# Altium PCB BAILEY.PcbDoc (part 1 of 8)
Units mil, origin at the board's own origin, x right, y up, seen from the top; angles counter-clockwise.
Board outline 6100 x 3000 mil, 4 copper layers (Signal Layer 1, Signal Layer 2, Signal Layer 3, Signal Layer 4), stack 59.904 mil thick; 167 components, 96 nets, 718 pads, 2907 vias.
Unrouted connection lines stored in the file: 1.
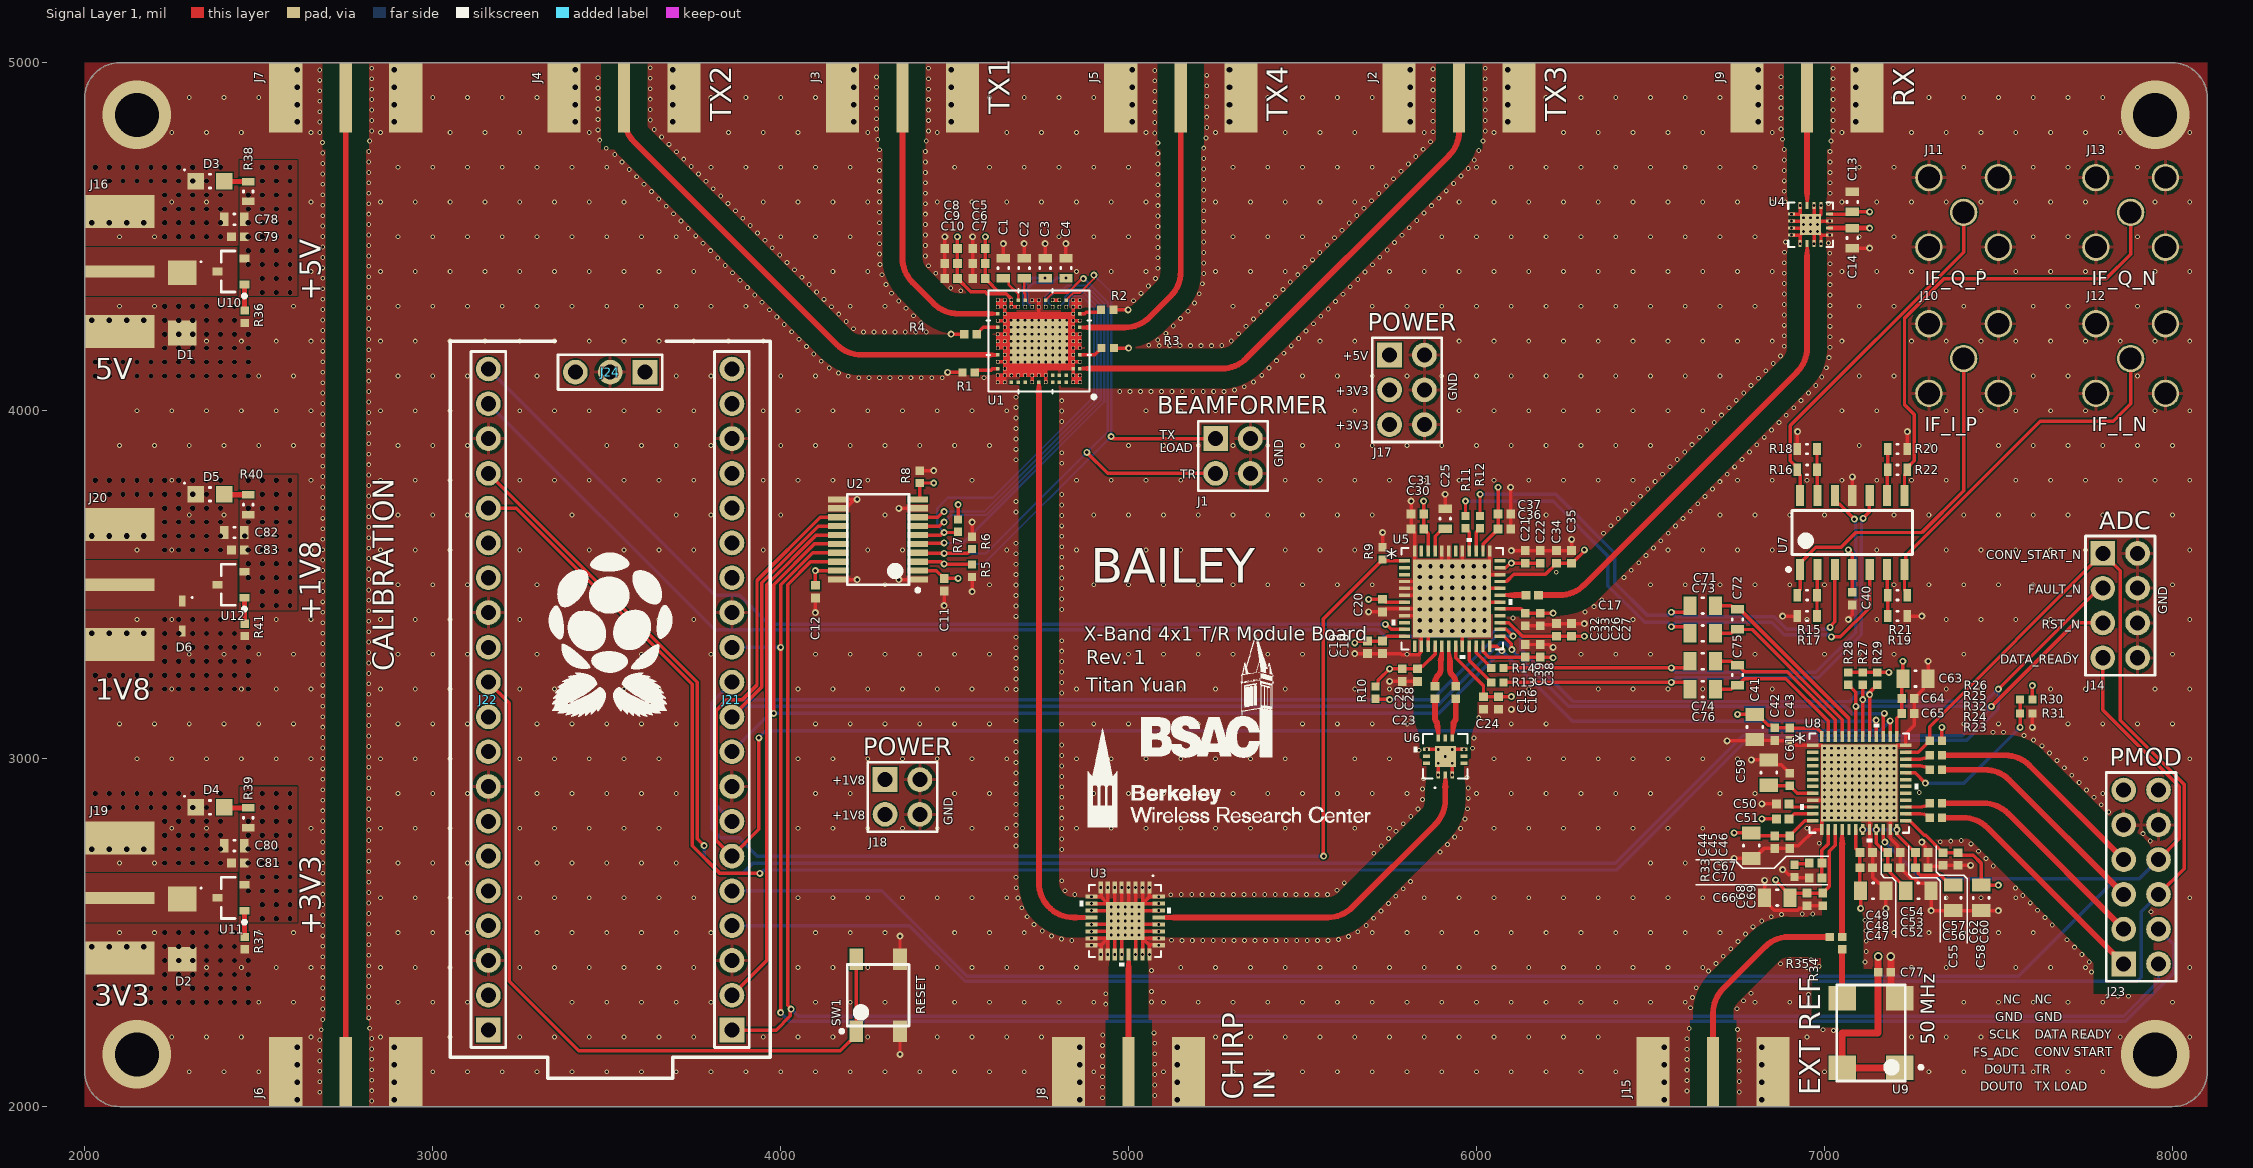
[diagram p0: Signal Layer 1 view]
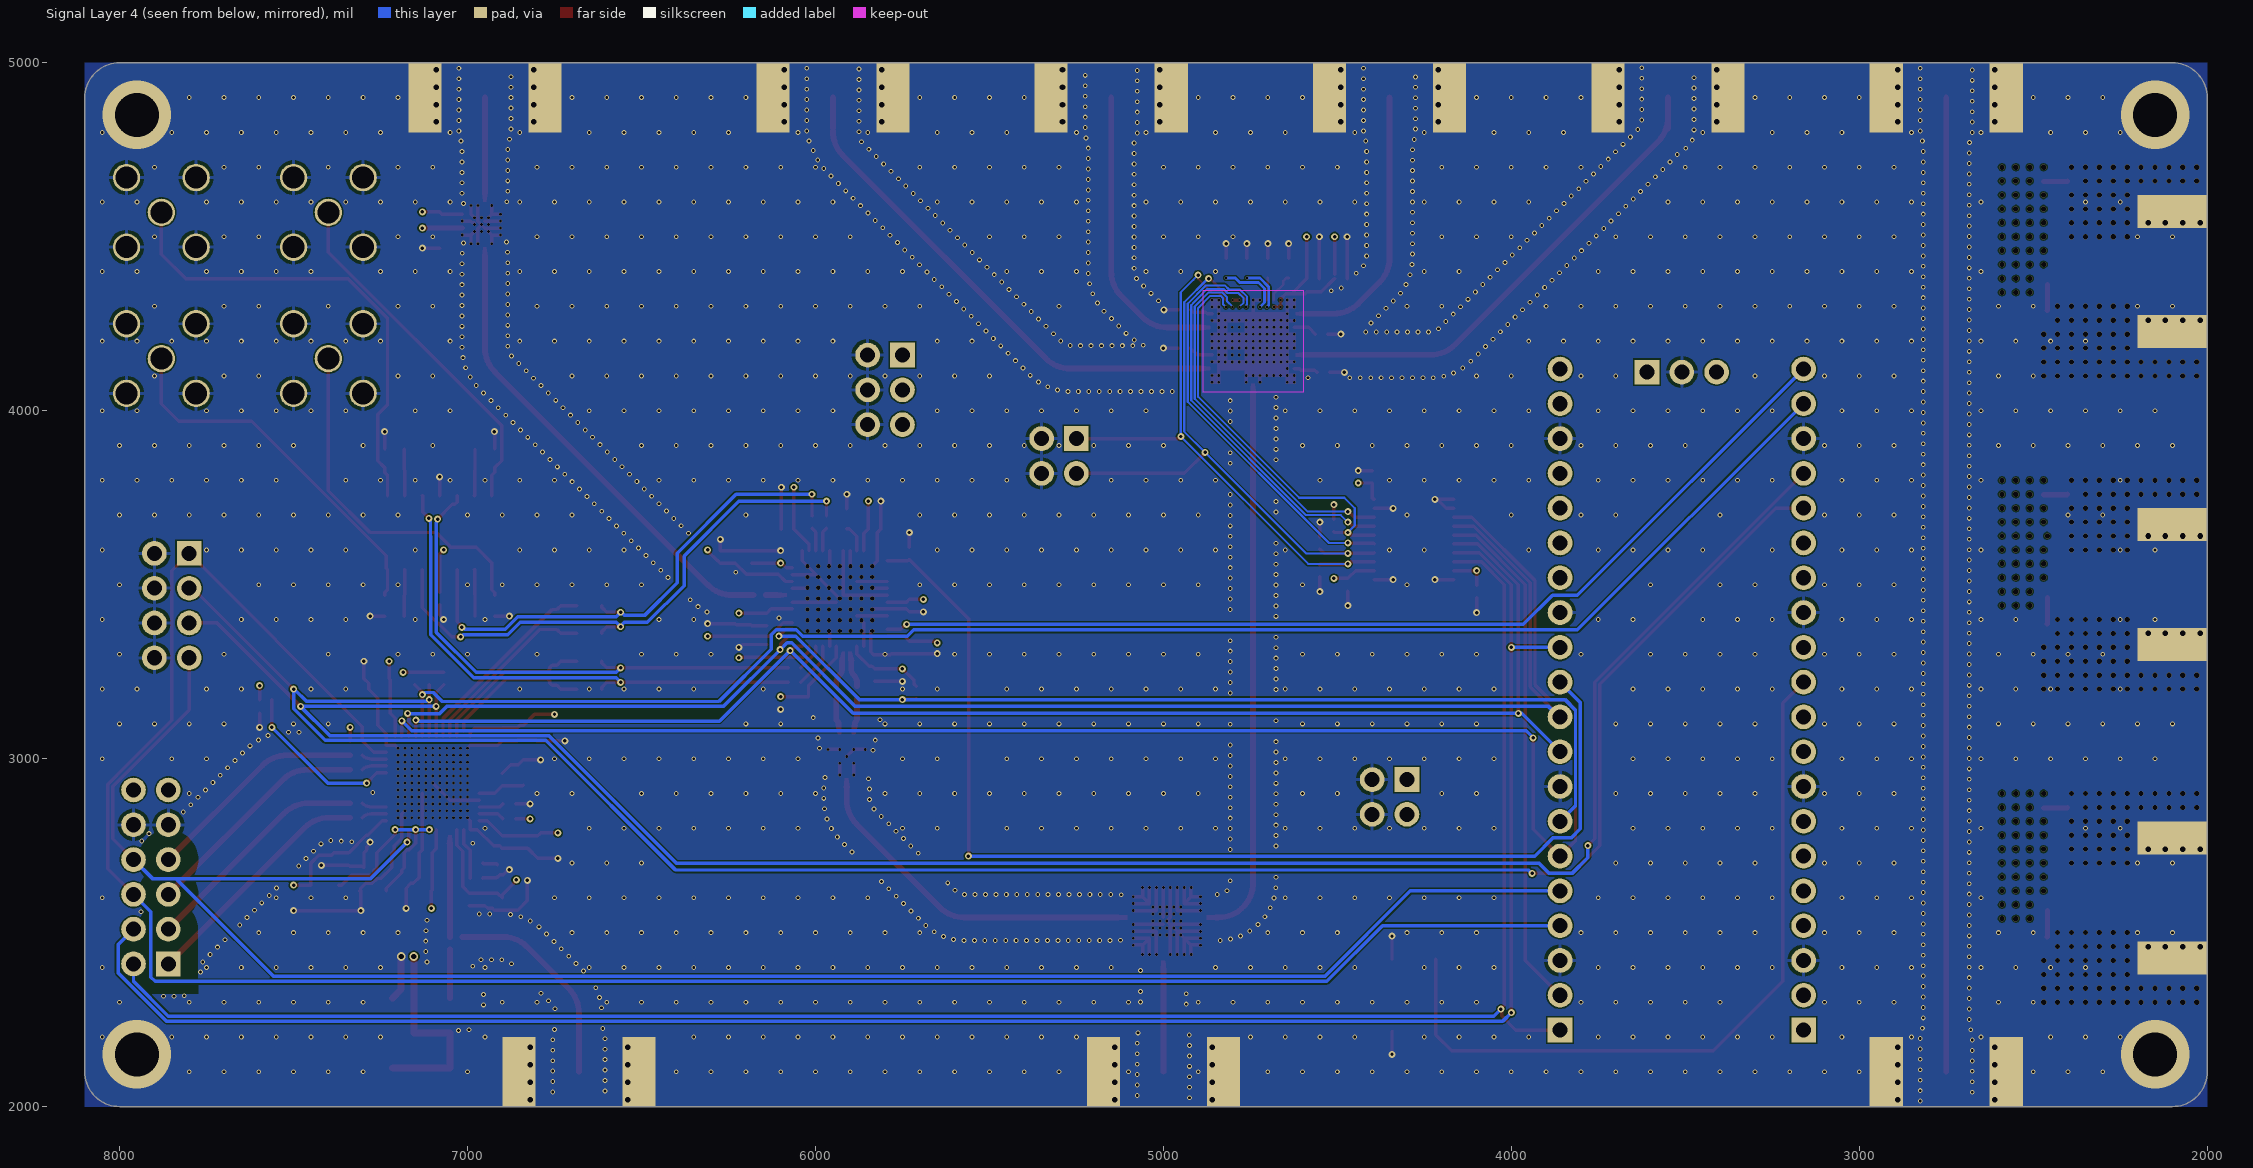
[diagram p1: Signal Layer 4 view, seen from below]
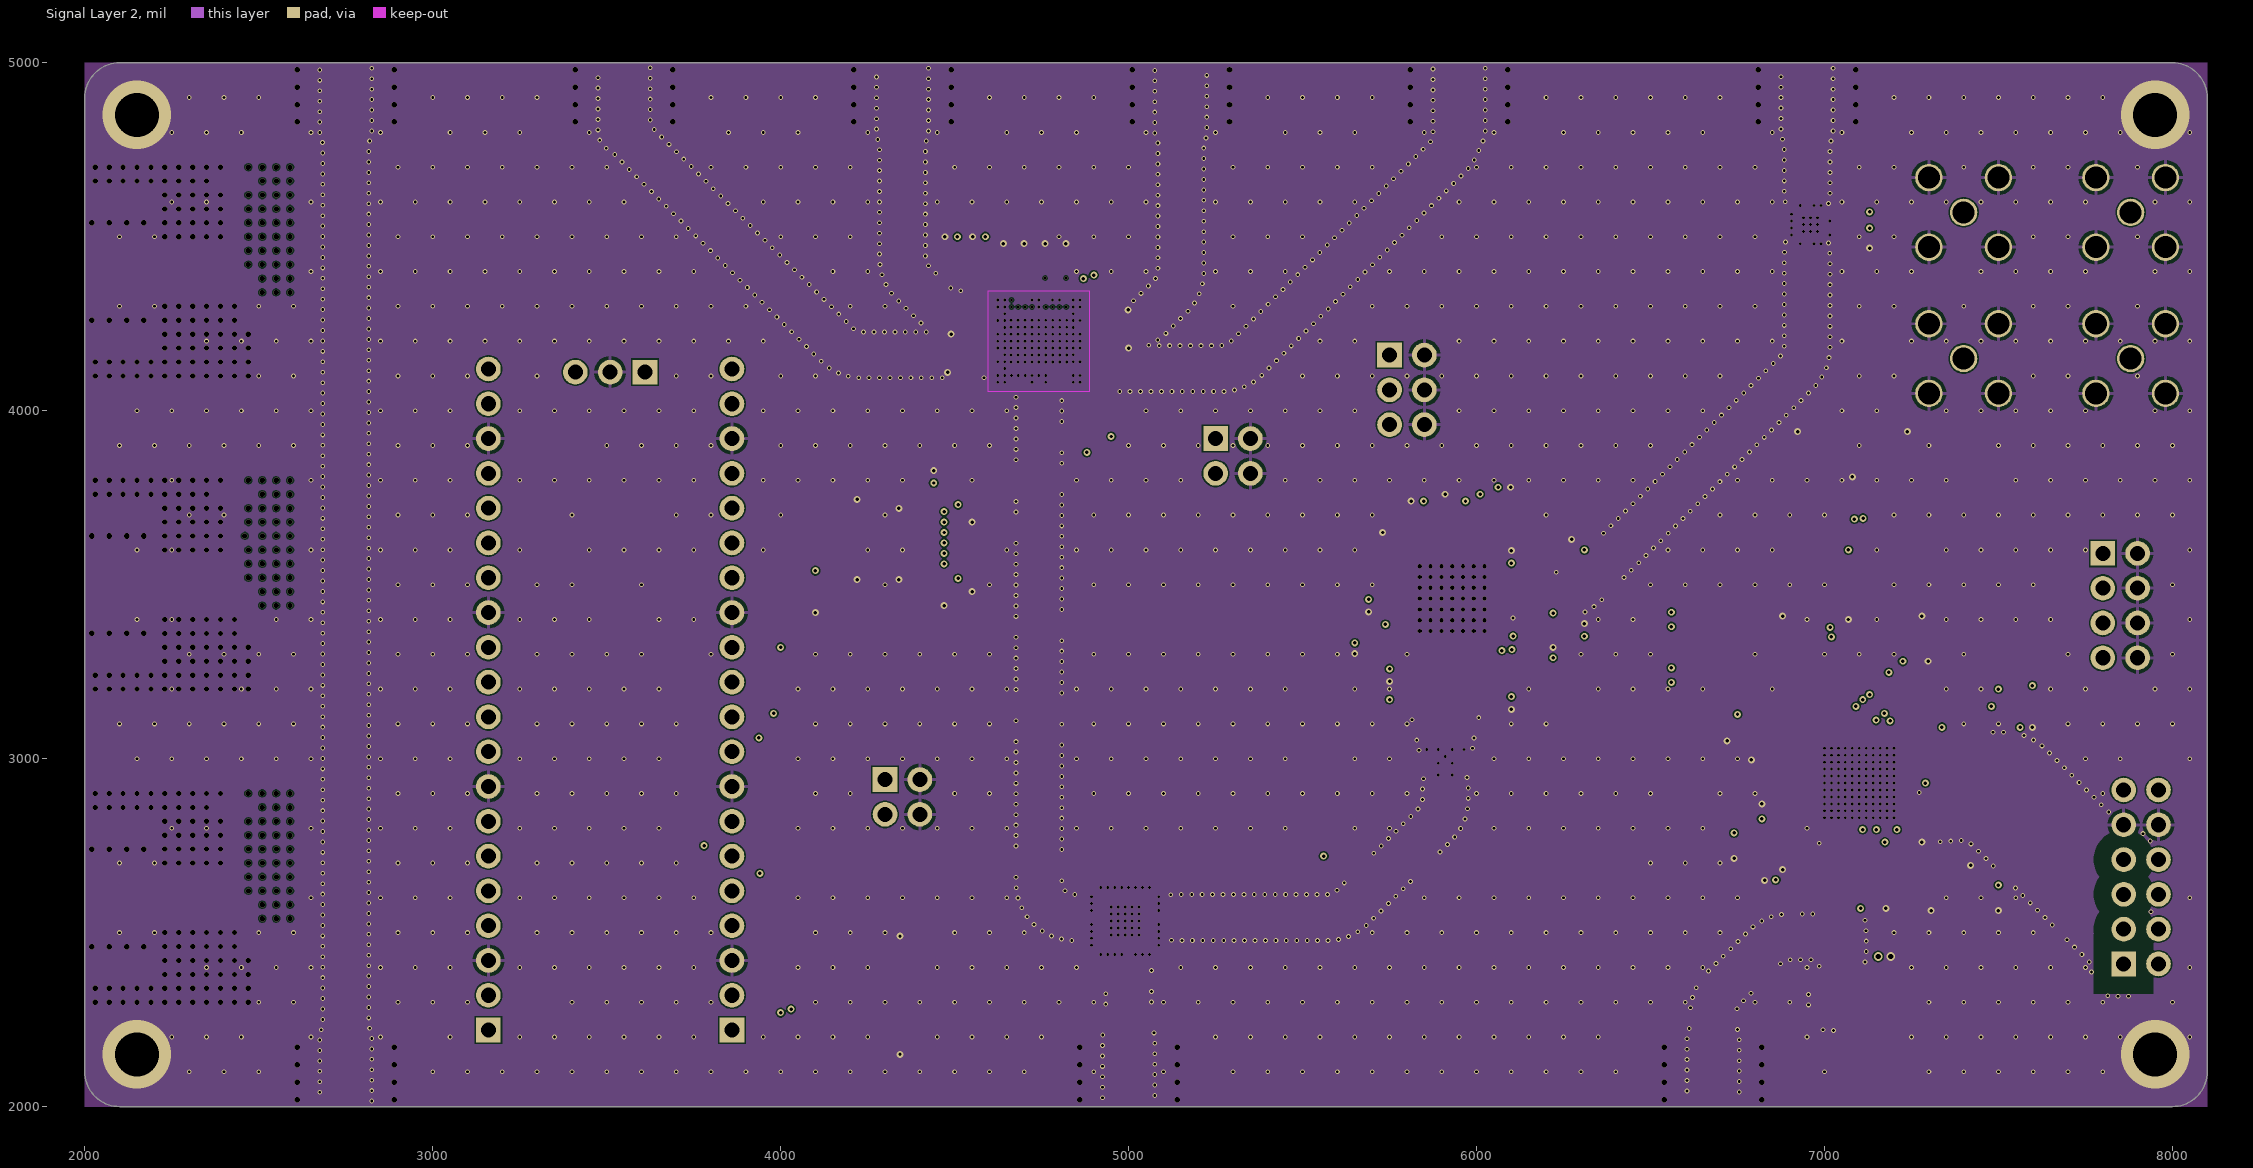
[diagram p2: Signal Layer 2]
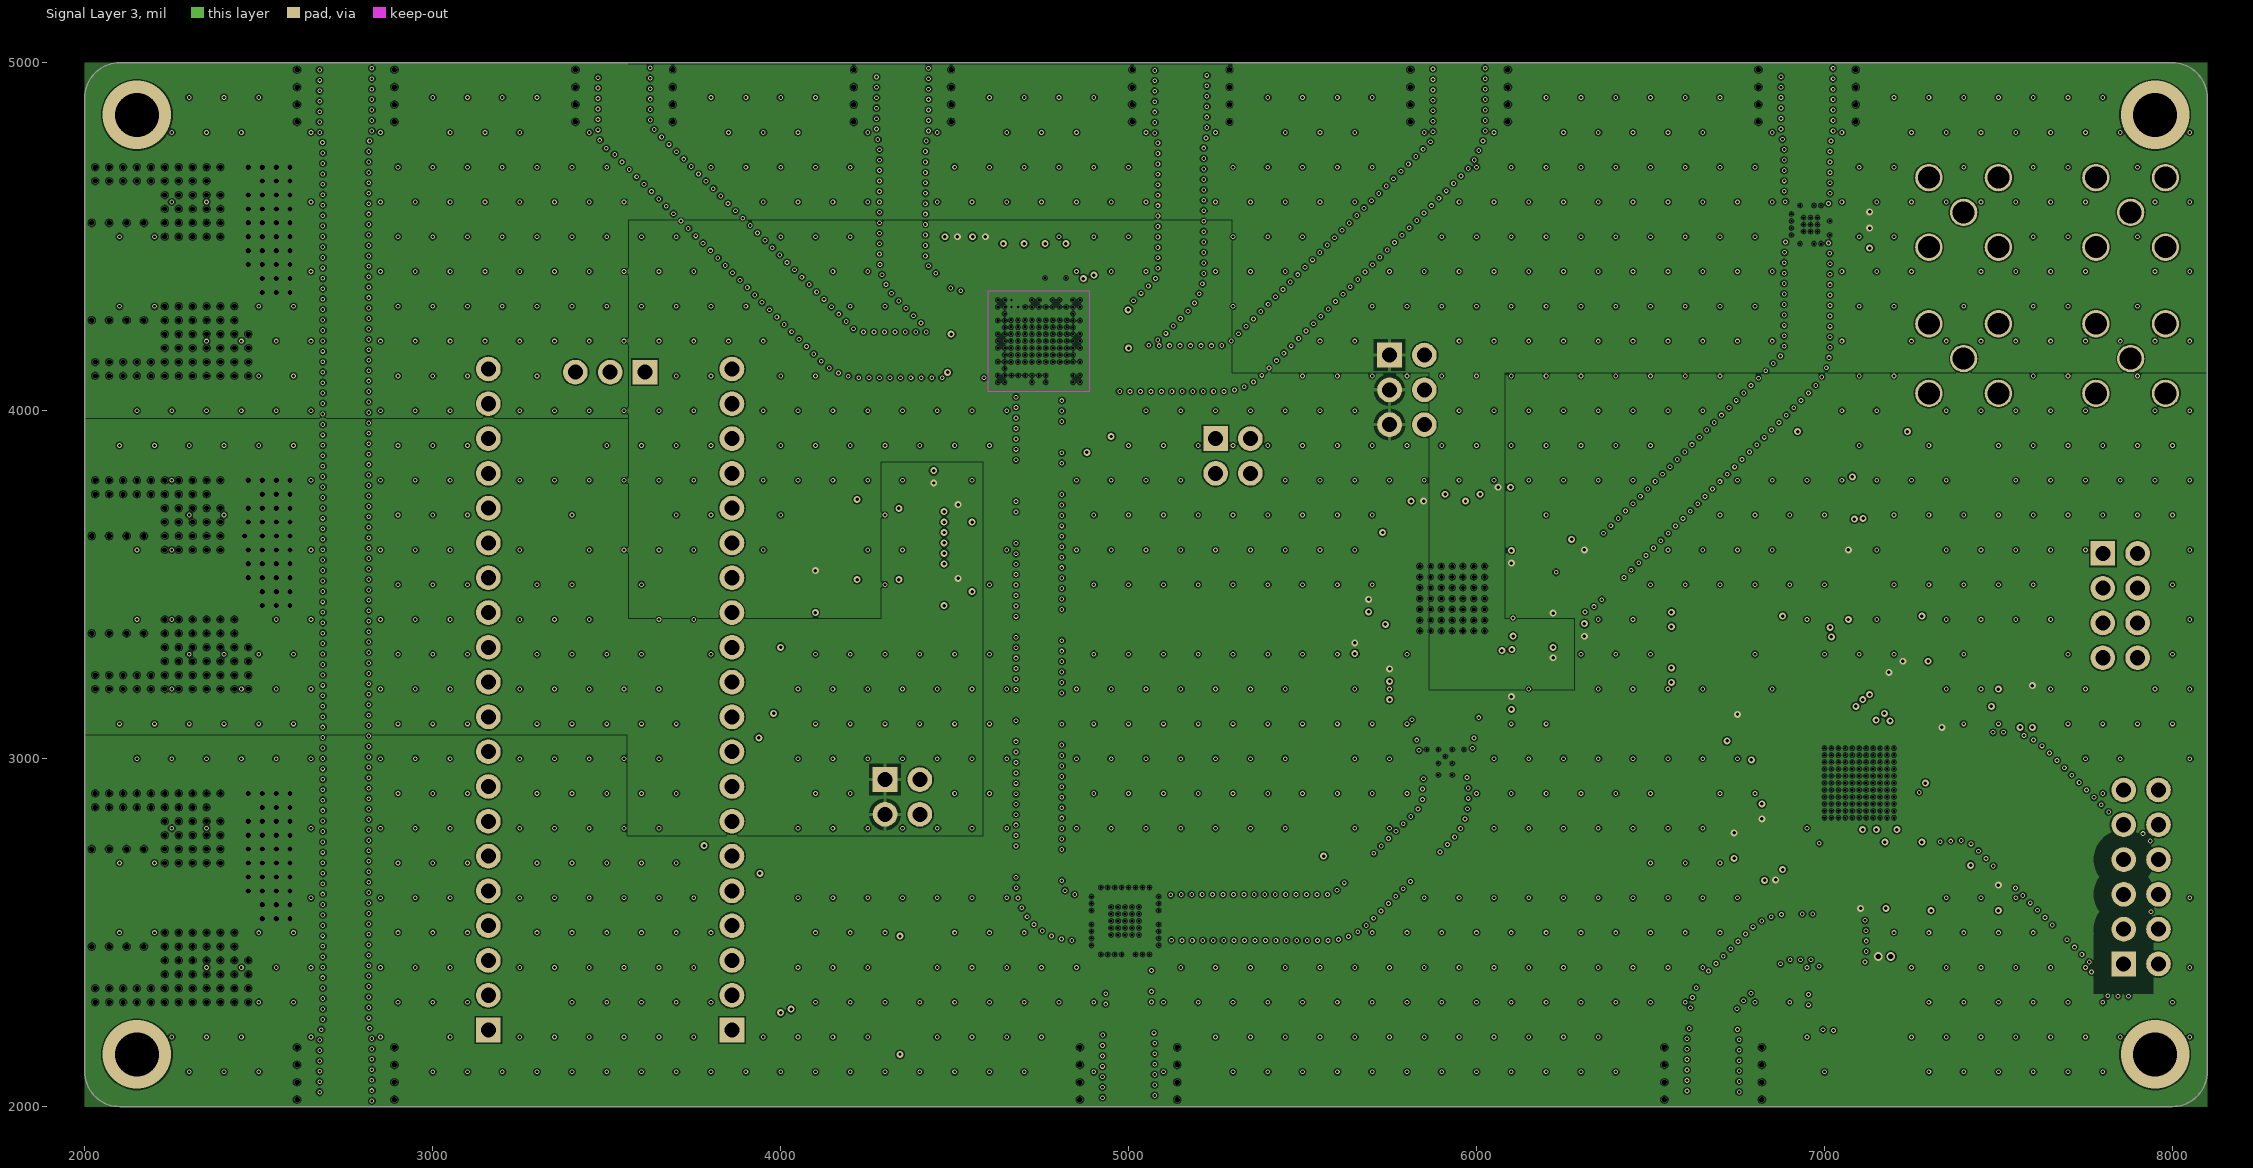
[diagram p3: Signal Layer 3]

## Layer stack, top to bottom
Top Solder: solder mask 0.5, Solder Resist, Dk 3.5
Signal Layer 1: signal copper 1.378
Core 1: core 10, Rogers 4350B 0.010 H1xHH CM 24x18, Dk 3.48
Signal Layer 2: signal copper 1.378
Prepreg 1: prepreg 6.696, S1000-2M 1080 18x24 RC71, Dk 3.63
Core 2: core 21, S1000-2M 0.021 HHxHH CM 18x24, Dk 4.24
Prepreg 2: prepreg 6.696, S1000-2M 1080 18x24 RC71, Dk 3.63
Signal Layer 3: signal copper 1.378
Core 3: core 10, S1000-2M 0.010 H1xHH CM 18x24, Dk 4.21
Signal Layer 4: signal copper 1.378
Bottom Solder: solder mask 0.5, Solder Resist, Dk 3.5

## Board outline
2000,2100 ccw(c2100,2100) 2100,2000 8000,2000 ccw(c8000,2100) 8100,2100 8100,2099.73 8100,4899.73 8100,4900 ccw(c8000,4900) 8000,5000 2100,5000 ccw(c2100,4900) 2000,4900

## Design rules (kind name [scope] priority, off if disabled: settings)
Clearance Microstrip [All vs InNetClass('50 Ω')] p1: gap=50 ignorepadtopadclearanceinfootprint=FALSE
Clearance [All] p2: gap=4 ignorepadtopadclearanceinfootprint=FALSE
ComponentClearance NP [Comment='NP'] p1: gap=-100 collisioncheckmode=3 verticalgap=-100 showdistances=FALSE donotcheckwithout3dbody=TRUE
ComponentClearance [All] p2: gap=10 collisioncheckmode=3 verticalgap=10 showdistances=FALSE
DiffPairsRouting [All] p1: maxlimit=10 minlimit=6 mostfreqgap=6 toplayer_minwidth=4 toplayer_maxwidth=50 toplayer_prefwidth=10 midlayer1_minwidth=4 midlayer1_maxwidth=50 midlayer1_prefwidth=10 midlayer2_minwidth=4 midlayer2_maxwidth=50 midlayer2_prefwidth=10 bottomlayer_minwidth=4 bottomlayer_maxwidth=50 bottomlayer_prefwidth=10 maxuncoupledlength=500
HoleSize [All] p1: absolutevalues=TRUE maxlimit=200 minlimit=4 maxpercent=80.000 minpercent=20.000
HoleToHoleClearance [All] p1: gap=6 allowstackedmicrovias=TRUE
PolygonConnect [All] p1: thpad.connectstyle=Relief thpad.reliefconductorwidth=10 thpad.reliefentries=4 thpad.polygonreliefangle="90 Angle" thpad.airgapwidth=10 smdpad.connectstyle=Direct smdpad.reliefconductorwidth=10 smdpad.reliefentries=4 smdpad.polygonreliefangle="90 Angle" smdpad.airgapwidth=10 via.connectstyle=Direct via.reliefconductorwidth=10 via.reliefentries=4 via.polygonreliefangle="90 Angle" via.airgapwidth=10
RoutingVias [All] p1: holewidth=15 width=25 viastyle="Through Hole" minholewidth=6 minwidth=11 maxholewidth=28 maxwidth=50
SolderMaskExpansion [All] p1: expansion=4 istentingtop=FALSE
SupplyNets "Schematic Supply Nets_1" [InNet('1V8')] p1: voltage=0.000
SupplyNets "Schematic Supply Nets_2" [InNet('3V3')] p2: voltage=0.000
SupplyNets "Schematic Supply Nets_6" [InNet('5V')] p3: voltage=0.000
SupplyNets "Schematic Supply Nets" [InNet('GND')] p4: voltage=0.000
Width "50 Ohms" [InNetClass('50 Ω')] p1: maxlimit=16.65 minlimit=10 preferedwidth=10 toplayer_minwidth=16.65 toplayer_prefwidth=16.65 minimp=50.000000 maximp=50.000000 favimp=50.000000
Width [All] p2: maxlimit=50 minlimit=4 preferedwidth=10 minimp=50.000000 maximp=50.000000 favimp=50.000000
26 further rules are at their usual default settings.

## Classes and differential pairs
component class SPLITTER: J6 J7 J8 U3
net class "50 Ω": ADC_DOUT0 ADC_DOUT1 ADC_FS_ADC ADC_MCLKIN ADC_SCLK LNA_OUT LO_BEAMFORMER LO_MIXER NetC17_1 NetC23_1 NetC23_2 NetC24_1 NetC24_2 NetJ6_1 NetJ15_1 NetR34_1 RF_IN_2 RX_IN_3 TX_OUT1_1 TX_OUT2_1 TX_OUT3_1 TX_OUT4_1
component class POWER: C78 C79 C80 C81 C82 C83 D1 D2 D3 D4 D5 D6 J16 J17 J18 J19 J20 R36 R37 R38 R39 R40 R41 U10 U11 U12
component class OSC: C77 J15 R34 R35 U9
component class MIXER: C15 C16 C17 C18 C19 C20 C21 C22 C23 C24 C25 C26 C27 C28 C29 C30 C31 C32 C33 C34 C35 C36 C37 C38 C39 R9 R10 R11 R12 R13 R14 U5 U6
component class MCU: J21 J22 J23 J24 SW1
component class LNA: C13 C14 J9 U4
component class IF: C40 J10 J11 J12 J13 R15 R16 R17 R18 R19 R20 R21 R22 U7
component class BEAMFORMER: C1 C2 C3 C4 C5 C6 C7 C8 C9 C10 C11 C12 J1 J2 J3 J4 J5 R1 R2 R3 R4 R5 R6 R7 R8 U1 U2
component class ADC: C41 C42 C43 C44 C45 C46 C47 C48 C49 C50 C51 C52 C53 C54 C55 C56 C57 C58 C59 C60 C61 C62 C63 C64 C65 C66 C67 C68 C69 C70 C71 C72 C73 C74 C75 C76 J14 R23 R24 R25 R26 R27 R28 R29 R30 R31 R32 R33 U8
differential pair IF_Q_6: +IF_Q_6_P -IF_Q_6_N
differential pair IF_I_6: +IF_I_6_P -IF_I_6_N
differential pair IF_I_EXT: +IF_I_EXT_P -IF_I_EXT_N
differential pair IF_Q_EXT: +IF_Q_EXT_P -IF_Q_EXT_N

## Components (designator, comment, footprint, x,y, rotation, side; value= is the part's Value field where it differs from the comment)
C1 "1 uF" CAP_0603 4640,4410 r270 top value=1µF
C2 "1 uF" CAP_0603 4700,4410 r270 top value=1µF
C3 "1 uF" CAP_0603 4760,4410 r270 top value=1µF
C4 "1 uF" CAP_0603 4820,4410 r270 top value=1µF
C5 "10 nF" CAP_0402 4570,4466.41 r180 top value=10nF
C6 "100 pF" CAP_0402 4570,4423.21 r0 top value=100pF
C7 "4.7 pF" CAP_0402 4570,4380 r180 top value=4.7pF
C8 "10 nF" CAP_0402 4490,4466.41 r180 top value=10nF
C9 "100 pF" CAP_0402 4490,4423.21 r0 top value=100pF
C10 "4.7 pF" CAP_0402 4490,4380 r180 top value=4.7pF
C11 "100 nF" CAP_0402 4470,3500 r90 top value=100nF
C12 "100 nF" CAP_0402 4100,3480 r270 top value=100nF
C13 "1 uF" CAP_0603 7080,4600 r270 top value=1µF
C14 "1 uF" CAP_0603 7080,4496.26 r90 top value=1µF
C15 "100 nF" CAP_0402 6020,3160 r90 top value=100nF
C16 "100 pF" CAP_0402 6063.2,3160 r270 top value=100pF
C17 "100 pF" CAP_0402 6160,3470 r0 top locked value=100pF
C18 "100 nF" CAP_0402 5730,3320 r90 top value=100nF
C19 "100 pF" CAP_0402 5686.8,3320 r270 top value=100pF
C20 "100 nF" CAP_0402 5730,3440 r90 top value=100nF
C21 "100 nF" CAP_0402 6140,3580 r270 top value=100nF
C22 "100 pF" CAP_0402 6183.2,3580 r90 top value=100pF
C23 "100 pF" CAP_0402 5880.31,3190 r270 top locked value=100pF
C24 "100 pF" CAP_0402 5940.31,3190 r270 top locked value=100pF
C25 "10 uF" CAP_0603 5910,3690 r270 top value=10µF
C26 "100 nF" CAP_0402 6230,3370 r270 top value=100nF
C27 "100 pF" CAP_0402 6273.2,3370 r90 top value=100pF
C28 "100 nF" CAP_0402 5830,3240 r90 top value=100nF
C29 "100 pF" CAP_0402 5786.8,3240 r270 top value=100pF
C30 "100 nF" CAP_0402 5830,3660 r0 top value=100nF
C31 "100 pF" CAP_0402 5830,3703.2 r180 top value=100pF
C32 "100 nF" CAP_0402 6140,3400 r90 top value=100nF
C33 "100 pF" CAP_0402 6183.2,3400 r270 top value=100pF
C34 "100 nF" CAP_0402 6230,3580 r270 top value=100nF
C35 "100 pF" CAP_0402 6273.2,3580 r90 top value=100pF
C36 "100 nF" CAP_0402 6080,3660 r180 top value=100nF
C37 "100 pF" CAP_0402 6080,3703.2 r0 top value=100pF
C38 "100 nF" CAP_0402 6183.2,3310 r270 top value=100nF
C39 "100 pF" CAP_0402 6140,3310 r90 top value=100pF
C40 "100 nF" CAP_0402 7080,3460 r90 top value=100nF
C41 "10 uF" CAP_0805 6799.63,3091.06 r90 top value=10µF
C42 "100 nF" CAP_0402 6856.8,3070.53 r90 top value=100nF
C43 "1 nF" CAP_0402 6900,3070 r90 top value=1nF
C44 "10 uF" CAP_0805 6790,2750 r90 top value=10µF
C45 "100 nF" CAP_0402 6856.8,2760 r90 top value=100nF
C46 "1 nF" CAP_0402 6900,2760 r90 top value=1nF
C47 "10 uF" CAP_0805 7140,2620 r180 top value=10µF
C48 "100 nF" CAP_0402 7120,2686.8 r180 top value=100nF
C49 "1 nF" CAP_0402 7120,2730 r180 top value=1nF
C50 "0.47 uF" CAP_0402 6880,2870 r0 top value=470nF
C51 "0.47 uF" CAP_0402 6880,2826.8 r0 top value=470nF
C52 "10 uF" CAP_0805 7270,2620 r180 top value=10µF
C53 "100 nF" CAP_0402 7200,2686.8 r180 top value=100nF
C54 "1 nF" CAP_0402 7200,2730 r180 top value=1nF
C55 "10 uF" CAP_0805 7370,2600 r90 top value=10µF
C56 "100 nF" CAP_0402 7279.42,2686.8 r180 top value=100nF
C57 "1 nF" CAP_0402 7279.42,2730 r180 top value=1nF
C58 "10 uF" CAP_0805 7450,2600 r90 top value=10µF
C59 "10 uF" CAP_0805 6840,2960 r270 top value=10µF
C60 "100 nF" CAP_0402 7383.92,2711.67 r90 top value=100nF
C61 "100 nF" CAP_0402 6900,2940 r270 top value=100nF
C62 "1 nF" CAP_0402 7340.72,2711.67 r90 top value=1nF
C63 "10 uF" CAP_0805 7261.62,3230.37 r180 top value=10µF
C64 "100 nF" CAP_0402 7240,3173.2 r180 top value=100nF
C65 "1 nF" CAP_0402 7240,3130 r180 top value=1nF
C66 "10 uF" CAP_0805 6864.28,2600.32 r0 top value=10µF
C67 "5.6 nF" CAP_0402 6974.49,2700 r0 top value=5.6nF
C68 "100 nF" CAP_0402 6950,2595.5 r90 top value=100nF
C69 "1 nF" CAP_0402 6995.08,2595.5 r90 top value=1nF
C70 "390 pF" CAP_0402 6974.49,2656.8 r0 top value=390pF
C71 "10 uF" CAP_0805 6650,3440 r0 top locked value=10µF
C72 "820 pF" CAP_0603 6750,3400 r90 top locked value=820pF
C73 "10 uF" CAP_0805 6650,3360 r0 top locked value=10µF
C74 "10 uF" CAP_0805 6650,3280 r0 top locked value=10µF
C75 "820 pF" CAP_0603 6750,3240 r90 top locked value=820pF
C76 "10 uF" CAP_0805 6650,3200 r0 top locked value=10µF
C77 "100 nF" CAP_0402 7172.51,2386.09 r180 top value=100nF
C78 "10 uF" CAP_0603 2430,4550 r0 top value=10µF
C79 "100 nF" CAP_0402 2440,4500 r0 top value=100nF
C80 "10 uF" CAP_0603 2430,2750 r0 top value=10µF
C81 "100 nF" CAP_0402 2440,2700 r0 top value=100nF
C82 "10 uF" CAP_0603 2430,3650 r0 top value=10µF
C83 "100 nF" CAP_0402 2440,3600 r0 top value=100nF
D1 "SMAJ6.0A" SMAJ 2280,4310 r270 top
D2 "SMAJ5.0A" SMAJ 2280,2510 r270 top
D3 "CTL0805FRD1T" CTL0805FRD1T 2360,4660 r0 top
D4 "CTL0805FRD1T" CTL0805FRD1T 2360,2860 r0 top
D5 "CTL0805FRD1T" CTL0805FRD1T 2360,3760 r0 top
D6 "CDSOD323-T03" CDSOD323 2280,3410 r270 top value=3pF
J1 "Header" CONN_2x2_2.54mm_PinHeader_Vertical 5250,3920 r0 top
J2 "CONN_RF_SMA" 142-0701-801 5950,5000 r90 top
J3 "CONN_RF_SMA" 142-0701-801 4350,5000 r90 top
J4 "CONN_RF_SMA" 142-0701-801 3550,5000 r90 top
J5 "CONN_RF_SMA" 142-0701-801 5150,5000 r90 top
J6 "CONN_RF_SMA" 142-0701-801 2750,2000 r270 top locked
J7 "CONN_RF_SMA" 142-0701-801 2750,5000 r90 top locked
J8 "CONN_RF_SMA" 142-0701-801 5000,2000 r270 top locked
J9 "CONN_RF_SMA" 142-0701-801 6950,5000 r90 top locked
J10 "CONN_RF_SMA" SMA-J-P-H-ST-TH1 7400,4150 r0 top
J11 "CONN_RF_SMA" SMA-J-P-H-ST-TH1 7400,4570 r0 top
J12 "CONN_RF_SMA" SMA-J-P-H-ST-TH1 7880,4150 r0 top
J13 "CONN_RF_SMA" SMA-J-P-H-ST-TH1 7880,4570 r0 top
J14 "Header" CONN_2x4_2.54mm_PinHeader_Vertical 7800,3590 r0 top
J15 "CONN_RF_SMA" 142-0701-801 6680,2000 r270 top locked
J16 "CONN_RF_SMA" 142-0701-801 2000,4400 r180 top locked
J17 "Header" CONN_2x3_2.54mm_PinHeader_Vertical 5750,4160 r0 top
J18 "Header" CONN_2x2_2.54mm_PinHeader_Vertical 4300,2940 r0 top
J19 "CONN_RF_SMA" 142-0701-801 2000,2600 r180 top locked
J20 "CONN_RF_SMA" 142-0701-801 2000,3500 r180 top
J21 "Header" CONN_1X20_2.54MM_PINSOCKET_VERTICAL 3860,2220 r180 top
J22 "Header" CONN_1X20_2.54MM_PINSOCKET_VERTICAL 3160,2220 r180 top
J23 "Header" CONN_2x6_2.54mm_PinHeader_Horizontal 7860,2410 r180 top locked
J24 "Header" CONN_1X3_2.54MM_PINSOCKET_VERTICAL 3610,4110.94 r270 top
R1 "50 Ω" RES_0402 4540,4110 r0 top value=50Ω
R2 "50 Ω" RES_0402 4938.66,4290 r180 top value=50Ω
R3 "50 Ω" RES_0402 4940,4180 r180 top value=50Ω
R4 "50 Ω" RES_0402 4545.59,4220 r0 top value=50Ω
R5 "100 kΩ" RES_0402 4550,3540 r90 top value=100kΩ
R6 "100 kΩ" RES_0402 4550,3620 r270 top value=100kΩ
R7 "100 kΩ" RES_0402 4510,3670 r270 top value=100kΩ
R8 "10 kΩ" RES_0402 4400,3810 r90 top value=10kΩ
R9 "10 kΩ" RES_0402 5730,3590 r90 top value=10kΩ
R10 "10 kΩ" RES_0402 5710,3190 r90 top value=10kΩ
R11 "50 Ω" RES_0402 5968.24,3680 r270 top locked value=50Ω
R12 "50 Ω" RES_0402 6009.87,3680 r270 top locked value=50Ω
R13 "50 Ω" RES_0402 6060,3219.19 r180 top locked value=50Ω
R14 "50 Ω" RES_0402 6060,3260.81 r180 top locked value=50Ω
R15 "50 Ω" RES_0603 6950,3470 r180 top value=50Ω
R16 "50 Ω" RES_0603 6950,3830 r180 top value=50Ω
R17 "NP" RES_0603 6950,3410 r180 top
R18 "NP" RES_0603 6950,3890 r180 top
R19 "NP" RES_0603 7210,3410 r0 top
R20 "NP" RES_0603 7210,3890 r0 top
R21 "50 Ω" RES_0603 7210,3470 r0 top value=50Ω
R22 "50 Ω" RES_0603 7210,3830 r0 top value=50Ω
R23 "33 Ω" RES_0402 7320,2830.45 r0 top locked value=33Ω
R24 "33 Ω" RES_0402 7320,2872.07 r0 top locked value=33Ω
R25 "33 Ω" RES_0402 7320,3009.87 r0 top locked value=33Ω
R26 "10 kΩ" RES_0402 7320,3051.49 r0 top value=10kΩ
R27 "10 kΩ" RES_0402 7110,3230 r90 top value=10kΩ
R28 "10 kΩ" RES_0402 7068.38,3230 r90 top value=10kΩ
R29 "10 kΩ" RES_0402 7151.62,3230 r90 top value=10kΩ
R30 "NP" RES_0402 7580,3170 r0 top
R31 "10 kΩ" RES_0402 7580,3130 r0 top value=10kΩ
R32 "33 Ω" RES_0402 7320,2968.24 r180 top locked value=33Ω
R33 "1 kΩ" RES_0402 6913.97,2677.63 r90 top value=1kΩ
R34 "0 Ω" RES_0402 7050.79,2470 r90 top locked value=0Ω
R35 "NP" RES_0402 7033.07,2487.72 r0 top locked
R36 "470 Ω" RES_0402 2460,4270 r90 top value=470Ω
R37 "470 Ω" RES_0402 2460,2470 r90 top value=470Ω
R38 "2 kΩ" RES_0603 2470,4630 r90 top value=2kΩ
R39 "1 kΩ" RES_0603 2470,2830 r90 top value=1kΩ
R40 "178 Ω" RES_0603 2470,3730 r90 top value=178Ω
R41 "470 Ω" RES_0402 2460,3370 r90 top value=470Ω
SW1 "Y97KT23B2NAFP" PTS647 4280,2320 r90 top locked
U1 "ADAR1000ACCZN" CC-88-1_ADI 4742.13,4200 r180 top locked
U2 "TXB0108PWR" TXB0108PWR 4280,3630 r180 top locked
U3 "EP2RKU+" PL-648 4990,2533.5 r270 top locked
U4 "PMA3-5153+" DQ3005 6960,4535 r270 top locked
U5 "LMX8410RGZT" RGZ48_TEX 5930,3460 r0 top locked
U6 "MTX2-143+" PL-497 5910.31,3006.5 r90 top locked
U7 "TLV9064IDR" TLV9064IDR 7080,3650 r90 top locked
U8 "ADAR7251WBCSZ" CS_48_1_ADI 7100,2930 r0 top locked
U9 "CWX813-050.0M" CWX8XX 7133.46,2211.42 r90 top locked
U10 "SI2301CDS" SI2301CDS 2420,4400 r180 top value=112mΩ
U11 "SI2301CDS" SI2301CDS 2420,2600 r180 top value=112mΩ
U12 "SI2301CDS" SI2301CDS 2420,3500 r180 top value=112mΩ

## Footprints (in the part's own frame and the unit in brackets; to place one, negate y for a bottom-side part, rotate by r counter-clockwise, add the part's x,y. Pads: shape width x height; smd on the part's side, far side on the other; paste and mask are expansions set on the pad)
142-0701-801 [mil] "Connector RF SMA Edge Launch"
  rect 200x35 smd: 1(-100,0)
  rect 200x95 smd: 2(-100,172.5) 2(-100,-172.5)
  rect 200x95 smd far side: 2(-100,172.5) 2(-100,-172.5)
  body extent -187,-188 375,188, height 173
CAP_0402 [mm] "Chip Capacitor, 2-Leads, Body 1.00x0.50mm, IPC Medium Density"
  rect 0.64x0.64 smd: 1(-0.46,0) 2(0.46,0)
  body extent -0.55,-0.3 0.55,0.3, height 0.6
CAP_0603 [mm] "Chip Capacitor, 2-Leads, Body 1.55x0.85mm, IPC Medium Density"
  rect 0.62x0.98 smd: 1(-0.73,0) 2(0.73,0)
  silkscreen extent -0.05,-0.39 0.05,0.39, body extent -0.8,-0.45 0.8,0.45, height 0.5
CAP_0805 [mm] "Chip Capacitor, 2-Leads, Body 2.00x1.25mm, IPC Medium Density"
  rect 0.95x1.35 smd: 1(-0.925,0) 2(0.925,0)
  silkscreen extent -0.05,-0.58 0.05,0.58, body extent -1.02,-0.65 1.02,0.65, height 0.5
CC-88-1_ADI [mil]
  rect 167x128 smd paste-83 mask+0: 89(0,0)
  rect 10x10 smd paste+0 mask+0: A1(-118.11,118.11) A2(-98.43,118.11) A3(-78.74,118.11) A4(-59.06,118.11) A5(-39.37,118.11) A6(-19.68,118.11) A7(0,118.11) A8(19.69,118.11) A9(39.37,118.11) A10(59.06,118.11) A11(78.74,118.11) A12(98.43,118.11) A13(118.11,118.11) B1(-118.11,98.43) B2(-98.43,98.43) B3(-78.74,98.43) B4(-59.06,98.43) B5(-39.37,98.43) B6(-19.68,98.43) B7(0,98.43) B8(19.69,98.43) B9(39.37,98.43) B10(59.06,98.43) B11(78.74,98.43) B12(98.43,98.43) B13(118.11,98.43) C1(-118.11,78.74) C2(-98.43,78.74) C12(98.43,78.74) C13(118.11,78.74) D1(-118.11,59.06) D2(-98.43,59.06) D12(98.43,59.06) D13(118.11,59.06) E1(-118.11,39.37) E2(-98.43,39.37) E12(98.43,39.37) E13(118.11,39.37) F1(-118.11,19.69) F2(-98.43,19.69) F12(98.43,19.69) F13(118.11,19.69) G1(-118.11,0) G2(-98.43,0) G12(98.43,0) G13(118.11,0) H1(-118.11,-19.69) H2(-98.43,-19.69) H12(98.43,-19.69) H13(118.11,-19.69) J1(-118.11,-39.37) J2(-98.43,-39.37) J12(98.43,-39.37) J13(118.11,-39.37) K1(-118.11,-59.06) K2(-98.43,-59.06) K12(98.43,-59.06) K13(118.11,-59.06) L1(-118.11,-78.74) L2(-98.43,-78.74) L12(98.43,-78.74) L13(118.11,-78.74) M1(-118.11,-98.43) M2(-98.43,-98.43) M3(-78.74,-98.43) M4(-59.06,-98.43) M5(-39.37,-98.43) M6(-19.68,-98.43) M7(0,-98.43) M8(19.69,-98.43) M9(39.37,-98.43) M10(59.06,-98.43) M11(78.74,-98.43) M12(98.43,-98.43) M13(118.11,-98.43) N1(-118.11,-118.11) N2(-98.43,-118.11) N3(-78.74,-118.11) N4(-59.06,-118.11) N5(-39.37,-118.11) N6(-19.68,-118.11) N7(0,-118.11) N8(19.69,-118.11) N9(39.37,-118.11) N10(59.06,-118.11) N11(78.74,-118.11) N12(98.43,-118.11) N13(118.11,-118.11)
  Keep-Out Layer region: -145.45,-145.45 -145.45,145.45 145.45,145.45 145.45,-145.45
  silkscreen extent -150,-150 150,150, body extent -140,-140 140,140, height 21
CDSOD323 [mm] "TVS Diode Surface Mount SOD-323"
  rect 0.8x0.5 smd: 1(-1.1,0) 2(1.1,0)
  silkscreen extent -1.4,0.67 -1.3,0.77, body extent -1.35,-0.72 1.35,0.72, height 1.15
CONN_1X3_2.54MM_PINSOCKET_VERTICAL [mm] "1x3 2.54mm Vertical Pin Socket"
  rect 1.8x1.8 hole 1.1: 1(0,0)
  round 1.8 hole 1.1: 2(0,-2.54) 3(0,-5.08)
  silkscreen extent -1.27,-6.35 1.27,1.27, body extent -1.3,-6.35 1.24,1.27, height 8.5
CONN_1X20_2.54MM_PINSOCKET_VERTICAL [mm] "1x20 2.54mm Vertical Pin Socket"
  rect 1.8x1.8 hole 1.1: 1(0,0)
  round 1.8 hole 1.1: 2(0,-2.54) 3(0,-5.08) 4(0,-7.62) 5(0,-10.16) 6(0,-12.7) 7(0,-15.24) 8(0,-17.78) 9(0,-20.32) 10(0,-22.86) 11(0,-25.4) 12(0,-27.94) 13(0,-30.48) 14(0,-33.02) 15(0,-35.56) 16(0,-38.1) 17(0,-40.64) 18(0,-43.18) 19(0,-45.72) 20(0,-48.26)
  silkscreen extent -1.27,-49.53 1.27,1.27, body extent -1.27,-49.53 1.27,1.27, height 8.5
CONN_2x2_2.54mm_PinHeader_Vertical [mm] "2x2 2.54mm Vertical Pin Header"
  rect 1.8x1.8 hole 1.1: 1(0,0)
  round 1.8 hole 1.1: 2(0,-2.54) 3(2.54,0) 4(2.54,-2.54)
  silkscreen extent -1.27,-3.81 3.81,1.27, body extent -1.27,-3.81 3.81,1.27, height 9.5
CONN_2x3_2.54mm_PinHeader_Vertical [mm] "2x3 2.54mm Vertical Pin Header"
  rect 1.8x1.8 hole 1.1: 1(0,0)
  round 1.8 hole 1.1: 2(0,-2.54) 3(0,-5.08) 4(2.54,0) 5(2.54,-2.54) 6(2.54,-5.08)
  silkscreen extent -1.27,-6.35 3.81,1.27, body extent -1.27,-6.35 3.81,1.27, height 9.5
CONN_2x4_2.54mm_PinHeader_Vertical [mm] "2x4 2.54mm Vertical Pin Header"
  rect 1.8x1.8 hole 1.1: 1(0,0)
  round 1.8 hole 1.1: 2(0,-2.54) 3(0,-5.08) 4(0,-7.62) 5(2.54,0) 6(2.54,-2.54) 7(2.54,-5.08) 8(2.54,-7.62)
  silkscreen extent -1.27,-8.89 3.81,1.27, body extent -1.27,-8.89 3.81,1.27, height 9.5
CONN_2x6_2.54mm_PinHeader_Horizontal [mm] "2x6 2.54mm Horizontal Pin Header"
  rect 1.8x1.8 hole 1.1: 1(0,0)
  round 1.8 hole 1.1: 2(0,-2.54) 3(0,-5.08) 4(0,-7.62) 5(0,-10.16) 6(0,-12.7) 7(-2.54,0) 8(-2.54,-2.54) 9(-2.54,-5.08) 10(-2.54,-7.62) 11(-2.54,-10.16) 12(-2.54,-12.7)
  silkscreen extent -3.81,-13.97 1.27,1.27, body extent -12.45,-13.97 0.38,1.27, height 5.08
CS_48_1_ADI [mm]
  rect 0.815x0.249 smd paste+0 mask+0: 1(-3.397,2.75) 2(-3.397,2.25) 3(-3.397,1.75) 4(-3.397,1.25) 5(-3.397,0.75) 6(-3.397,0.25) 7(-3.397,-0.25) 8(-3.397,-0.75) 9(-3.397,-1.25) 10(-3.397,-1.75) 11(-3.397,-2.25) 12(-3.397,-2.75) 25(3.397,-2.75) 26(3.397,-2.25) 27(3.397,-1.75) 28(3.397,-1.25) 29(3.397,-0.75) 30(3.397,-0.25) 31(3.397,0.25) 32(3.397,0.75) 33(3.397,1.25) 34(3.397,1.75) 35(3.397,2.25) 36(3.397,2.75)
  rect 0.249x0.815 smd paste+0 mask+0: 13(-2.75,-3.397) 14(-2.25,-3.397) 15(-1.75,-3.397) 16(-1.25,-3.397) 17(-0.75,-3.397) 18(-0.25,-3.397) 19(0.25,-3.397) 20(0.75,-3.397) 21(1.25,-3.397) 22(1.75,-3.397) 23(2.25,-3.397) 24(2.75,-3.397) 37(2.75,3.397) 38(2.25,3.397) 39(1.75,3.397) 40(1.25,3.397) 41(0.75,3.397) 42(0.25,3.397) 43(-0.25,3.397) 44(-0.75,3.397) 45(-1.25,3.397) 46(-1.75,3.397) 47(-2.25,3.397) 48(-2.75,3.397)
  rect 5.6x5.6 smd paste-2.8 mask+0: 49(0,0)
  silkscreen extent -4.31,-4.31 4.31,4.31, body extent -3.5,-3.5 3.5,3.5, height 0.99
CTL0805FRD1T [mm] "Chip Diode, 2-Leads, Body 2.00x1.25mm, IPC Medium Density"
  rect 1.2x1.2 smd: 1(-1.05,0) 2(1.05,0)
  silkscreen extent -1.91,-0.5 0.05,0.86, body extent -1.05,-0.67 1.05,0.67, height 0.9
CWX8XX [mm] "5.0x7.0mm Surface Mount CMOS Clock Oscillator"
  rect 1.8x2 smd: 1(-2.54,-2.1) 2(2.54,-2.1) 3(2.54,2.1) 4(-2.54,2.1)
  silkscreen extent -3.5,-3.78 3.5,2.5, body extent -3.5,-2.5 3.5,2.5, height 1.3
DQ3005 [mil]
  rect 20x9 smd: 1(-55,30) 2(-55,10) 3(-55,-10) 4(-55,-30) 9(55,-30) 10(55,-10) 11(55,10) 12(55,30)
  rect 9x20 smd: 5(-30,-55) 6(-10,-55) 7(10,-55) 8(30,-55) 13(30,55) 14(10,55) 15(-10,55) 16(-30,55)
  rect 61x61 smd: 17(0,0)
  silkscreen extent -64,-64 64,64, body extent -59,-59 59,59, height 35
PL-497 [mil]
  rect 20x10 smd: 1(-53.5,20) 2(-53.5,0) 3(-53.5,-20) 7(53.5,-20) 8(53.5,0) 9(53.5,20)
  rect 10x20 smd: 4(-20,-53.5) 5(0,-53.5) 6(20,-53.5) 10(20,53.5) 11(0,53.5) 12(-20,53.5)
  rect 60x60 smd: 13(0,0)
  silkscreen extent -92,-64 64,91, body extent -59,-59 59,59, height 35
PL-648 [mil]
  rect 35x12 smd: 1(-96.5,70) 2(-96.5,50) 3(-96.5,30) 4(-96.5,10) 5(-96.5,-10) 6(-96.5,-30) 7(-96.5,-50) 8(-96.5,-70) 17(96.5,-70) 18(96.5,-50) 19(96.5,-30) 20(96.5,-10) 21(96.5,10) 22(96.5,30) 23(96.5,50) 24(96.5,70)
  rect 12x35 smd: 9(-70,-96.5) 10(-50,-96.5) 11(-30,-96.5) 12(-10,-96.5) 13(10,-96.5) 14(30,-96.5) 15(50,-96.5) 16(70,-96.5) 25(70,96.5) 26(50,96.5) 27(30,96.5) 28(10,96.5) 29(-10,96.5) 30(-30,96.5) 31(-50,96.5) 32(-70,96.5)
  rect 110x110 smd: 33(0,0)
  silkscreen extent -132,-130 130,130, body extent -99,-99 99,99, height 39
PTS647 [mm] "4.5x4.5mm SMT Tactile Switch"
  rect 1.55x1 smd: 1(-2.625,1.6) 2(2.625,1.6) 3(2.625,-1.6) 4(-2.625,-1.6)
  silkscreen extent -2.75,-2.25 2.25,2.77, body extent -2.25,-2.25 2.25,2.25, height 3.8
RES_0402 [mm] "Chip Resistor, 2-Leads, Body 1.00x0.50mm, IPC Medium Density"
  rect 0.6x0.6 smd: 1(-0.45,0) 2(0.45,0)
  body extent -0.55,-0.3 0.55,0.3, height 0.6
RES_0603 [mm] "Chip Resistor, 2-Leads, Body 1.55x0.85mm, IPC Medium Density"
  rect 0.55x0.9 smd: 1(-0.725,0) 2(0.725,0)
  silkscreen extent -0.05,-0.35 0.05,0.35, body extent -0.8,-0.45 0.8,0.45, height 0.5
RGZ48_TEX [mil]
  rect 32x10 smd paste+0 mask+0: 1(-137,108.27) 2(-137,88.58) 3(-137,68.9) 4(-137,49.21) 5(-137,29.53) 6(-137,9.84) 7(-137,-9.84) 8(-137,-29.53) 9(-137,-49.21) 10(-137,-68.9) 11(-137,-88.58) 12(-137,-108.27) 25(137,-108.27) 26(137,-88.58) 27(137,-68.9) 28(137,-49.21) 29(137,-29.53) 30(137,-9.84) 31(137,9.84) 32(137,29.53) 33(137,49.21) 34(137,68.9) 35(137,88.58) 36(137,108.27)
  rect 10x32 smd paste+0 mask+0: 13(-108.27,-137) 14(-88.58,-137) 15(-68.9,-137) 16(-49.21,-137) 17(-29.53,-137) 18(-9.84,-137) 19(9.84,-137) 20(29.53,-137) 21(49.21,-137) 22(68.9,-137) 23(88.58,-137) 24(108.27,-137) 37(108.27,137) 38(88.58,137) 39(68.9,137) 40(49.21,137) 41(29.53,137) 42(9.84,137) 43(-9.84,137) 44(-29.53,137) 45(-49.21,137) 46(-68.9,137) 47(-88.58,137) 48(-108.27,137)
  rect 224x224 smd paste-111.5 mask-111.5: 49(0,0)
  silkscreen extent -173,-173 173,173, body extent -141,-141 141,141, height 39
SI2301CDS [mm] "SOT23, 3-Leads, Body 2.92x2.37mm, Pitch 0.95mm, IPC Medium Density"
  rect 0.724x0.559 smd: 1(-0.984,0.95) 2(-0.984,-0.95) 3(0.984,0)
  silkscreen extent -1.11,-1.5 0.7,1.9, body extent -1.32,-1.52 1.32,1.52, height 1.12
SMA-J-P-H-ST-TH1 [mm] "Connector RF SMA Vertical"
  round 2 hole 1.6: 1(0,0) 2(-2.54,-2.54) 2(-2.54,2.54) 2(2.54,-2.54) 2(2.54,2.54)
  body extent -3.17,-3.17 3.17,3.17, height 9.99
SMAJ [mm] "TVS Diode Surface Mount DO-214AC"
  rect 1.8x2.1 smd: 1(-2.2,0) 2(2.2,0)
  silkscreen extent -3.05,1.33 -2.95,1.43, body extent -2.64,-1.4 2.64,1.4, height 2.34
TLV9064IDR [mm] "SOIC, 14-Leads, Body 8.65x3.90mm, Pitch 1.27mm, IPC Medium Density"
  rect 1.55x0.6 smd: 1(-2.7,3.81) 2(-2.7,2.54) 3(-2.7,1.27) 4(-2.7,0) 5(-2.7,-1.27) 6(-2.7,-2.54) 7(-2.7,-3.81) 8(2.7,-3.81) 9(2.7,-2.54) 10(2.7,-1.27) 11(2.7,0) 12(2.7,1.27) 13(2.7,2.54) 14(2.7,3.81)
  silkscreen extent -2.82,-4.4 1.6,4.78, body extent -3,-4.4 3,4.4, height 1.75
TXB0108PWR [mm] "8-Bit Bidirectional Voltage-Level Translator with Auto-Direction Sensing and ±15kV ESD Protection"
  rect 1.5x0.45 smd: 1(-2.9,2.925) 2(-2.9,2.275) 3(-2.9,1.625) 4(-2.9,0.975) 5(-2.9,0.325) 6(-2.9,-0.325) 7(-2.9,-0.975) 8(-2.9,-1.625) 9(-2.9,-2.275) 10(-2.9,-2.925) 11(2.9,-2.925) 12(2.9,-2.275) 13(2.9,-1.625) 14(2.9,-0.975) 15(2.9,-0.325) 16(2.9,0.325) 17(2.9,0.975) 18(2.9,1.625) 19(2.9,2.275) 20(2.9,2.925)
  silkscreen extent -3.03,-3.3 2.25,3.82, body extent -3.2,-3.3 3.2,3.3, height 1.2

## Part data
C1 C2 C3 C4 C13 C14: library part CAP, "25V 1uF X7R ±10% 0603 Multilayer Ceramic Capacitors MLCC - SMD/SMT ROHS", Case Code (Imperial)=0603, Case Code (Metric)=1608, Dielectric=Ceramic, Manufacturer="Samsung Electro-Mechanics", Manufacturer Part Number=CL10B105KA8NNNC, Max Operating Temperature=125°C, Min Operating Temperature=-55°C, Supplier Part Number=1276-1184-1-ND, Tolerance=+-10%, Voltage=25V, Voltage Rating="25 V", Case/Package=0603, Category="Ceramic Capacitors", China RoHS=Compliant, ComponentLink1Description=https://datasheet.octopart.com:443/CL10B105KA8NNNC-Samsung-Electro-Mechanics-datasheet-182019882.pdf?src-supplier=IHS, ComponentLink1URL=https://datasheet.octopart.com:443/CL10B105KA8NNNC-Samsung-Electro-Mechanics-datasheet-182019882.pdf?src-supplier=IHS, ComponentLink2Description=https://datasheet.octopart.com:443/CL10B105KA8NNNC-Samsung-Electro-Mechanics-datasheet-106547815.pdf?src-supplier=Upverter, ComponentLink2URL=https://datasheet.octopart.com:443/CL10B105KA8NNNC-Samsung-Electro-Mechanics-datasheet-106547815.pdf?src-supplier=Upverter, ComponentLink3Description=https://datasheet.octopart.com:443/CL10B105KA8NNNC-Samsung-Electro-Mechanics-datasheet-137699931.pdf?src-supplier=Samsung+SCT, ComponentLink3URL=https://datasheet.octopart.com:443/CL10B105KA8NNNC-Samsung-Electro-Mechanics-datasheet-137699931.pdf?src-supplier=Samsung+SCT, ComponentLink4Description=https://datasheet.octopart.com:443/CL10B105KA8NNNC-Samsung-Electro-Mechanics-datasheet-116890983.pdf?src-supplier=Future+Electronics, ComponentLink4URL=https://datasheet.octopart.com:443/CL10B105KA8NNNC-Samsung-Electro-Mechanics-datasheet-116890983.pdf?src-supplier=Future+Electronics, ComponentLink5Description=https://datasheet.octopart.com:443/CL10B105KA8NNNC-Samsung-datasheet-12527851.pdf?src-supplier=Future+Electronics, ComponentLink5URL=https://datasheet.octopart.com:443/CL10B105KA8NNNC-Samsung-datasheet-12527851.pdf?src-supplier=Future+Electronics, ComponentLink6Description=https://datasheet.octopart.com:443/CL10B105KA8NNNC-Samsung-datasheet-26669022.pdf?src-supplier=Future+Electronics, ComponentLink6URL=https://datasheet.octopart.com:443/CL10B105KA8NNNC-Samsung-datasheet-26669022.pdf?src-supplier=Future+Electronics, ComponentLink7Description=https://datasheet.octopart.com:443/CL10B105KA8NNNC-Samsung-Electro-Mechanics-datasheet-149136795.pdf?src-supplier=Future+Electronics, ComponentLink7URL=https://datasheet.octopart.com:443/CL10B105KA8NNNC-Samsung-Electro-Mechanics-datasheet-149136795.pdf?src-supplier=Future+Electronics, ComponentLink8Description=https://datasheet.octopart.com:443/CL10B105KA8NNNC-Samsung-datasheet-37081328.pdf?src-supplier=Future+Electronics, ComponentLink8URL=https://datasheet.octopart.com:443/CL10B105KA8NNNC-Samsung-datasheet-37081328.pdf?src-supplier=Future+Electronics, ComponentLink9Description=https://datasheet.octopart.com/CL10B105KA8NNNC-Samsung-Electro-Mechanics-datasheet-97040617.pdf, ComponentLink9URL=https://datasheet.octopart.com/CL10B105KA8NNNC-Samsung-Electro-Mechanics-datasheet-97040617.pdf, ComponentLink10Description=https://datasheet.octopart.com/CL10B105KA8NNNC-Samsung-Electro-Mechanics-datasheet-8324245.pdf, ComponentLink10URL=https://datasheet.octopart.com/CL10B105KA8NNNC-Samsung-Electro-Mechanics-datasheet-8324245.pdf, ComponentLink11Description=https://datasheet.octopart.com:443/CL10B105KA8NNNC-Samsung-datasheet-59220082.pdf?src-supplier=TME, ComponentLink11URL=https://datasheet.octopart.com:443/CL10B105KA8NNNC-Samsung-datasheet-59220082.pdf?src-supplier=TME, ComponentLink12Description=https://datasheet.octopart.com:443/CL10B105KA8NNNC-Samsung-Electro-Mechanics-datasheet-11897796.pdf?src-supplier=Arrow+Electronics, ComponentLink12URL=https://datasheet.octopart.com:443/CL10B105KA8NNNC-Samsung-Electro-Mechanics-datasheet-11897796.pdf?src-supplier=Arrow+Electronics, Contact Plating=Tin, Country of Origin="Mainland China, Philippines, South Korea", Depth=800µm, Dielectric Material=Ceramic, Export Control Classification Number (ECCN) Code=EAR99, Harmonized Tariff Schedule (HTS) Code=8532.24.00.20, Height=900µm, Introduction Date=2009-11-02, Length=1.6mm, Lifecycle Status=Production, Material=Ceramic, Mounting Technology="Surface Mount", Number of Terminals=2, Package Size=0603, Pricing="1=0.1, 10=0.036, 50=0.0244, 100=0.0208, 500=0.01486, 1000=0.01305 (USD)", Radiation Hardening=No, REACH SVHC=Yes, RoHS=Compliant, Schedule B="8532240020, 8532240020|8532240020, 8532240020|8532240020|8532240020, 8532240020|8532240020|8532240020|8532240020", Stock=1060664, Supplier=DigiKey, Thickness=889µm, Voltage Rating (DC)=25V, Width=800µm
C5 C8: library part CAP, "Multilayer Ceramic Capacitor, 0.01 uF, 25 V, ± 10%, X7R, 0402 [1005 Metric]", Case Code (Imperial)=0402, Case Code (Metric)=1005, Dielectric=Ceramic, Insulation Resistance=10GΩ, Manufacturer="Murata Electronics", Manufacturer Lifecycle Status=NRND, Manufacturer Part Number=GRM155R71E103KA01D, Max Operating Temperature=125°C, Min Operating Temperature=-55°C, Supplier Part Number=490-1312-1-ND, Tolerance=+-10%, Voltage=25V, Voltage Rating="25 V", Case/Package=0402, Category="Ceramic Capacitors", ComponentLink1Description=https://datasheet.octopart.com:443/GRM155R71E103KA01D-Murata-datasheet-501912.pdf?src-supplier=Upverter, ComponentLink1URL=https://datasheet.octopart.com:443/GRM155R71E103KA01D-Murata-datasheet-501912.pdf?src-supplier=Upverter, ComponentLink2Description=https://datasheet.octopart.com:443/GRM155R71E103KA01D-Murata-datasheet-8326352.pdf?src-supplier=element14+APAC, ComponentLink2URL=https://datasheet.octopart.com:443/GRM155R71E103KA01D-Murata-datasheet-8326352.pdf?src-supplier=element14+APAC, ComponentLink3Description=https://datasheet.octopart.com:443/GRM155R71E103KA01D-Murata-datasheet-62320227.pdf?src-supplier=element14+APAC, ComponentLink3URL=https://datasheet.octopart.com:443/GRM155R71E103KA01D-Murata-datasheet-62320227.pdf?src-supplier=element14+APAC, ComponentLink4Description=https://datasheet.octopart.com:443/GRM155R71E103KA01D-Murata-datasheet-12548432.pdf?src-supplier=_legacy+Avnet, ComponentLink4URL=https://datasheet.octopart.com:443/GRM155R71E103KA01D-Murata-datasheet-12548432.pdf?src-supplier=_legacy+Avnet, ComponentLink5Description=https://datasheet.octopart.com:443/GRM155R71E103KA01D-Murata-datasheet-14396901.pdf?src-supplier=Future+Electronics, ComponentLink5URL=https://datasheet.octopart.com:443/GRM155R71E103KA01D-Murata-datasheet-14396901.pdf?src-supplier=Future+Electronics, ComponentLink6Description=https://datasheet.octopart.com:443/GRM155R71E103KA01D-Murata-datasheet-22122223.pdf?src-supplier=Future+Electronics, ComponentLink6URL=https://datasheet.octopart.com:443/GRM155R71E103KA01D-Murata-datasheet-22122223.pdf?src-supplier=Future+Electronics, ComponentLink7Description=https://datasheet.octopart.com:443/GRM155R71E103KA01D-Murata-datasheet-44106405.pdf?src-supplier=Future+Electronics, ComponentLink7URL=https://datasheet.octopart.com:443/GRM155R71E103KA01D-Murata-datasheet-44106405.pdf?src-supplier=Future+Electronics, ComponentLink8Description=https://datasheet.octopart.com:443/GRM155R71E103KA01D-Murata-datasheet-165579666.pdf?src-supplier=TME, ComponentLink8URL=https://datasheet.octopart.com:443/GRM155R71E103KA01D-Murata-datasheet-165579666.pdf?src-supplier=TME, ComponentLink9Description=https://datasheet.octopart.com:443/GRM155R71E103KA01D-Murata-datasheet-59876780.pdf?src-supplier=TME, ComponentLink9URL=https://datasheet.octopart.com:443/GRM155R71E103KA01D-Murata-datasheet-59876780.pdf?src-supplier=TME, ComponentLink10Description=https://datasheet.octopart.com:443/GRM155R71E103KA01D-Murata-datasheet-141266224.pdf?src-supplier=Ciiva, ComponentLink10URL=https://datasheet.octopart.com:443/GRM155R71E103KA01D-Murata-datasheet-141266224.pdf?src-supplier=Ciiva, ComponentLink11Description=https://datasheet.octopart.com:443/GRM155R71E103KA01D-Murata-datasheet-140691364.pdf?src-supplier=Ciiva, ComponentLink11URL=https://datasheet.octopart.com:443/GRM155R71E103KA01D-Murata-datasheet-140691364.pdf?src-supplier=Ciiva, ComponentLink12Description=https://datasheet.octopart.com:443/GRM155R71E103KA01D-Murata-datasheet-138740934.pdf?src-supplier=Ciiva, ComponentLink12URL=https://datasheet.octopart.com:443/GRM155R71E103KA01D-Murata-datasheet-138740934.pdf?src-supplier=Ciiva, ComponentLink13Description=https://datasheet.octopart.com:443/GRM155R71E103KA01D-Murata-datasheet-120101189.pdf?src-supplier=Megastar, ComponentLink13URL=https://datasheet.octopart.com:443/GRM155R71E103KA01D-Murata-datasheet-120101189.pdf?src-supplier=Megastar, ComponentLink14Description=https://datasheet.octopart.com/GRM155R71E103KA01D-Murata-datasheet-12515295.pdf, ComponentLink14URL=https://datasheet.octopart.com/GRM155R71E103KA01D-Murata-datasheet-12515295.pdf, ComponentLink15Description=https://datasheet.octopart.com/GRM155R71E103KA01D-Murata-datasheet-12510076.pdf, ComponentLink15URL=https://datasheet.octopart.com/GRM155R71E103KA01D-Murata-datasheet-12510076.pdf, ComponentLink16Description=https://datasheet.octopart.com/GRM155R71E103KA01D-Murata-datasheet-11978611.pdf, ComponentLink16URL=https://datasheet.octopart.com/GRM155R71E103KA01D-Murata-datasheet-11978611.pdf, ComponentLink17Description=https://datasheet.octopart.com/GRM155R71E103KA01D-Murata-datasheet-10025737.pdf, ComponentLink17URL=https://datasheet.octopart.com/GRM155R71E103KA01D-Murata-datasheet-10025737.pdf, ComponentLink18Description=https://datasheet.octopart.com/GRM155R71E103KA01D-Murata-datasheet-8819587.pdf, ComponentLink18URL=https://datasheet.octopart.com/GRM155R71E103KA01D-Murata-datasheet-8819587.pdf, ComponentLink19Description=https://datasheet.octopart.com:443/GRM155R71E103KA01D-Murata-datasheet-632409.pdf?src-supplier=Farnell, ComponentLink19URL=https://datasheet.octopart.com:443/GRM155R71E103KA01D-Murata-datasheet-632409.pdf?src-supplier=Farnell, ComponentLink20Description=https://datasheet.octopart.com:443/GRM155R71E103KA01D-Murata-datasheet-514334.pdf?src-supplier=Farnell, ComponentLink20URL=https://datasheet.octopart.com:443/GRM155R71E103KA01D-Murata-datasheet-514334.pdf?src-supplier=Farnell, ComponentLink21Description=https://datasheet.octopart.com:443/GRM155R71E103KA01D-Murata-datasheet-148211.pdf?src-supplier=Garrett, ComponentLink21URL=https://datasheet.octopart.com:443/GRM155R71E103KA01D-Murata-datasheet-148211.pdf?src-supplier=Garrett, ComponentLink22Description=https://datasheet.octopart.com:443/GRM155R71E103KA01D-Murata-datasheet-102.pdf?src-supplier=DigiKey, ComponentLink22URL=https://datasheet.octopart.com:443/GRM155R71E103KA01D-Murata-datasheet-102.pdf?src-supplier=DigiKey, ComponentLink23Description=http://sigma.octopart.com:80/reach_statement/Murata-company-16.pdf?src-supplier=Compliance+Statements, ComponentLink23URL=http://sigma.octopart.com:80/reach_statement/Murata-company-16.pdf?src-supplier=Compliance+Statements, Country of Origin="Japan, Mainland China, Philippines, Singapore, Thailand", Depth=500µm, Dielectric Material=Ceramic, Export Control Classification Number (ECCN) Code=EAR99, Harmonized Tariff Schedule (HTS) Code=8532.24.00.20, Height=500µm, Introduction Date=2004-11-19, Lead Free="Lead Free", Length=1mm, Lifecycle Status=NRND, Material=Ceramic, Mounting Technology="Surface Mount", Number of Terminals=2, Package Size=0402, Pins=2, Pricing="1=0.1, 10=0.021, 50=0.014, 100=0.0118, 500=0.00822, 1000=0.00713, 2500=0.00598, 5000=0.00529, 10000=0.0046, 20000=0.00415, 30000=0.00392, 50000=0.00367, 70000=0.00353, 100000=0.00339 (USD)", Radiation Hardening=No, REACH SVHC=Yes, RoHS=Compliant, Schedule B="8532240020, 8532240020|8532240020, 8532240020|8532240020|8532240020, 8532240020|8532240020|8532240020|8532240020", Stock=5215934, Supplier=DigiKey, Termination=SMD/SMT, Thickness=500µm, Voltage Rating (DC)=25V, Width=500µm
C6 C9 C16 C17 C19 C22 C23 C24 C27 C29 C31 C33 C35 C37 C39: library part CAP, "50V 100pF NP0 ±5% 0402 Multilayer Ceramic Capacitors MLCC - SMD/SMT ROHS", Case Code (Imperial)=0402, Case Code (Metric)=1005, Dielectric=Ceramic, Insulation Resistance=100GΩ, Manufacturer=Yageo, Manufacturer Part Number=CC0402JRNPO9BN101, Max Operating Temperature=125°C, Min Operating Temperature=-55°C, Supplier Part Number=311-1024-1-ND, Temperature Coefficient=30ppm/°C, Tolerance=+-5%, Voltage=50V, Voltage Rating="50 V", Case/Package=0402, Category="Ceramic Capacitors", China RoHS=Compliant, ComponentLink1Description=https://datasheet.octopart.com:443/CC0402JRNPO9BN101-Yageo-datasheet-182140217.pdf?src-supplier=IHS, ComponentLink1URL=https://datasheet.octopart.com:443/CC0402JRNPO9BN101-Yageo-datasheet-182140217.pdf?src-supplier=IHS, ComponentLink2Description=https://datasheet.octopart.com:443/CC0402JRNPO9BN101-Yageo-datasheet-10406438.pdf?src-supplier=element14+APAC, ComponentLink2URL=https://datasheet.octopart.com:443/CC0402JRNPO9BN101-Yageo-datasheet-10406438.pdf?src-supplier=element14+APAC, ComponentLink3Description=https://datasheet.octopart.com:443/CC0402JRNPO9BN101-Yageo-datasheet-151948684.pdf?src-supplier=element14+APAC, ComponentLink3URL=https://datasheet.octopart.com:443/CC0402JRNPO9BN101-Yageo-datasheet-151948684.pdf?src-supplier=element14+APAC, ComponentLink4Description=https://datasheet.octopart.com:443/CC0402JRNPO9BN101-Yageo-datasheet-67645495.pdf?src-supplier=element14+APAC, ComponentLink4URL=https://datasheet.octopart.com:443/CC0402JRNPO9BN101-Yageo-datasheet-67645495.pdf?src-supplier=element14+APAC, ComponentLink5Description=https://datasheet.octopart.com:443/CC0402JRNPO9BN101-Yageo-datasheet-10882999.pdf?src-supplier=element14+APAC, ComponentLink5URL=https://datasheet.octopart.com:443/CC0402JRNPO9BN101-Yageo-datasheet-10882999.pdf?src-supplier=element14+APAC, ComponentLink6Description=https://datasheet.octopart.com:443/CC0402JRNPO9BN101-Yageo-datasheet-78855684.pdf?src-supplier=Upverter, ComponentLink6URL=https://datasheet.octopart.com:443/CC0402JRNPO9BN101-Yageo-datasheet-78855684.pdf?src-supplier=Upverter, ComponentLink7Description=https://datasheet.octopart.com:443/CC0402JRNPO9BN101-Yageo-Group-datasheet-188689597.pdf?src-supplier=Farnell, ComponentLink7URL=https://datasheet.octopart.com:443/CC0402JRNPO9BN101-Yageo-Group-datasheet-188689597.pdf?src-supplier=Farnell, ComponentLink8Description=https://datasheet.octopart.com:443/CC0402JRNPO9BN101-Yageo-datasheet-10621397.pdf?src-supplier=Farnell, ComponentLink8URL=https://datasheet.octopart.com:443/CC0402JRNPO9BN101-Yageo-datasheet-10621397.pdf?src-supplier=Farnell, ComponentLink9Description=https://datasheet.octopart.com:443/CC0402JRNPO9BN101-Yageo-datasheet-65873193.pdf?src-supplier=Newark, ComponentLink9URL=https://datasheet.octopart.com:443/CC0402JRNPO9BN101-Yageo-datasheet-65873193.pdf?src-supplier=Newark, ComponentLink10Description=https://datasheet.octopart.com:443/CC0402JRNPO9BN101-Yageo-datasheet-5301394.pdf?src-supplier=Newark, ComponentLink10URL=https://datasheet.octopart.com:443/CC0402JRNPO9BN101-Yageo-datasheet-5301394.pdf?src-supplier=Newark, ComponentLink11Description=https://datasheet.octopart.com:443/CC0402JRNPO9BN101-Yageo-datasheet-182966517.pdf?src-supplier=Newark, ComponentLink11URL=https://datasheet.octopart.com:443/CC0402JRNPO9BN101-Yageo-datasheet-182966517.pdf?src-supplier=Newark, ComponentLink12Description=https://datasheet.octopart.com:443/CC0402JRNPO9BN101-Yageo-datasheet-137875056.pdf?src-supplier=Future+Electronics, ComponentLink12URL=https://datasheet.octopart.com:443/CC0402JRNPO9BN101-Yageo-datasheet-137875056.pdf?src-supplier=Future+Electronics, ComponentLink13Description=https://datasheet.octopart.com:443/CC0402JRNPO9BN101-Yageo-datasheet-136957424.pdf?src-supplier=Future+Electronics, ComponentLink13URL=https://datasheet.octopart.com:443/CC0402JRNPO9BN101-Yageo-datasheet-136957424.pdf?src-supplier=Future+Electronics, ComponentLink14Description=https://datasheet.octopart.com:443/CC0402JRNPO9BN101-Yageo-datasheet-137700082.pdf?src-supplier=Future+Electronics, ComponentLink14URL=https://datasheet.octopart.com:443/CC0402JRNPO9BN101-Yageo-datasheet-137700082.pdf?src-supplier=Future+Electronics, ComponentLink15Description=https://datasheet.octopart.com:443/CC0402JRNPO9BN101-Yageo-datasheet-62126864.pdf?src-supplier=Future+Electronics, ComponentLink15URL=https://datasheet.octopart.com:443/CC0402JRNPO9BN101-Yageo-datasheet-62126864.pdf?src-supplier=Future+Electronics, ComponentLink16Description=https://datasheet.octopart.com:443/CC0402JRNPO9BN101-Yageo-datasheet-62091628.pdf?src-supplier=Future+Electronics, ComponentLink16URL=https://datasheet.octopart.com:443/CC0402JRNPO9BN101-Yageo-datasheet-62091628.pdf?src-supplier=Future+Electronics, ComponentLink17Description=https://datasheet.octopart.com:443/CC0402JRNPO9BN101-Yageo-datasheet-24578986.pdf?src-supplier=Future+Electronics, ComponentLink17URL=https://datasheet.octopart.com:443/CC0402JRNPO9BN101-Yageo-datasheet-24578986.pdf?src-supplier=Future+Electronics, ComponentLink18Description=https://datasheet.octopart.com:443/CC0402JRNPO9BN101-Yageo-datasheet-16730043.pdf?src-supplier=Future+Electronics, ComponentLink18URL=https://datasheet.octopart.com:443/CC0402JRNPO9BN101-Yageo-datasheet-16730043.pdf?src-supplier=Future+Electronics, ComponentLink19Description=https://datasheet.octopart.com:443/CC0402JRNPO9BN101-Yageo-datasheet-12589826.pdf?src-supplier=Future+Electronics, ComponentLink19URL=https://datasheet.octopart.com:443/CC0402JRNPO9BN101-Yageo-datasheet-12589826.pdf?src-supplier=Future+Electronics, ComponentLink20Description=https://datasheet.octopart.com:443/CC0402JRNPO9BN101-Yageo-datasheet-8817079.pdf?src-supplier=element14, ComponentLink20URL=https://datasheet.octopart.com:443/CC0402JRNPO9BN101-Yageo-datasheet-8817079.pdf?src-supplier=element14, ComponentLink21Description=https://datasheet.octopart.com:443/CC0402JRNPO9BN101-Yageo-datasheet-8324240.pdf?src-supplier=element14, ComponentLink21URL=https://datasheet.octopart.com:443/CC0402JRNPO9BN101-Yageo-datasheet-8324240.pdf?src-supplier=element14, ComponentLink22Description=https://datasheet.octopart.com:443/CC0402JRNPO9BN101-Yageo-datasheet-504625.pdf?src-supplier=element14, ComponentLink22URL=https://datasheet.octopart.com:443/CC0402JRNPO9BN101-Yageo-datasheet-504625.pdf?src-supplier=element14, ComponentLink23Description=https://datasheet.octopart.com:443/CC0402JRNPO9BN101-Yageo-datasheet-5321569.pdf?src-supplier=element14, ComponentLink23URL=https://datasheet.octopart.com:443/CC0402JRNPO9BN101-Yageo-datasheet-5321569.pdf?src-supplier=element14, ComponentLink24Description=https://datasheet.octopart.com:443/CC0402JRNPO9BN101-Yageo-datasheet-68296204.pdf?src-supplier=Megastar, ComponentLink24URL=https://datasheet.octopart.com:443/CC0402JRNPO9BN101-Yageo-datasheet-68296204.pdf?src-supplier=Megastar, ComponentLink25Description=http://sigma.octopart.com:80/conflict_mineral_statement/Yageo-company-3.pdf?src-supplier=Compliance+Statements, ComponentLink25URL=http://sigma.octopart.com:80/conflict_mineral_statement/Yageo-company-3.pdf?src-supplier=Compliance+Statements, ComponentLink26Description=http://sigma.octopart.com:80/rohs_statement/Yageo-company-2.pdf?src-supplier=Compliance+Statements, ComponentLink26URL=http://sigma.octopart.com:80/rohs_statement/Yageo-company-2.pdf?src-supplier=Compliance+Statements, Composition=Ceramic, Depth=500µm, Dielectric Material=Ceramic, Halogen Free="Halogen Free", Height=500µm, Lead Free="Lead Free", Length=1mm, Lifecycle Status=Production, Mounting Technology="Surface Mount", Number of Terminals=2, Package Size=0402, Pins=2, Pricing="1=0.08, 10=0.003, 10000=0.0032, 20000=0.0031, 30000=0.00304, 50000=0.00283, 70000=0.00282 (USD)", Radiation Hardening=No, REACH SVHC=Yes, RoHS=Compliant, Schedule B="8532240020, 8532240020|8532240020|8532240020|8532240020|8532240020|8532240020|8532240020|8532240020|8532240020|8532240020|8532240020|8532240020|8532240020|8532240020|8532240020|8532240020|8532240020|8532240020|8532240020|8532240020|8532240020|8532240020|8532240020|85", Stock=3080901, Supplier=DigiKey, Termination=SMD/SMT, Thickness=558.8µm, Voltage Rating (AC)=50V, Voltage Rating (DC)=50V, Width=500µm
C7 C10: library part CAP, "0402 4.7 pF 50 V ±0.25 pF Tolerance C0G SMT Multilayer Ceramic Capacitor", Case Code (Imperial)=0402, Case Code (Metric)=1005, Dielectric=Ceramic, Manufacturer="Murata Electronics", Manufacturer Lifecycle Status=NRND, Manufacturer Part Number=GRM1555C1H4R7CA01D, Max Operating Temperature=125°C, Min Operating Temperature=-55°C, Supplier Part Number=490-5874-1-ND, Temperature Coefficient=30ppm/°C, Tolerance="+-0.25 pF", Voltage=50V, Voltage Rating="50 V", Case/Package=0402, Category="Ceramic Capacitors", ComponentLink1Description=https://datasheet.octopart.com:443/GRM1555C1H4R7CA01D-Murata-datasheet-62317075.pdf?src-supplier=element14+APAC, ComponentLink1URL=https://datasheet.octopart.com:443/GRM1555C1H4R7CA01D-Murata-datasheet-62317075.pdf?src-supplier=element14+APAC, ComponentLink2Description=https://datasheet.octopart.com/GRM1555C1H4R7CA01D-Murata-datasheet-12547556.pdf, ComponentLink2URL=https://datasheet.octopart.com/GRM1555C1H4R7CA01D-Murata-datasheet-12547556.pdf, ComponentLink3Description=https://datasheet.octopart.com/GRM1555C1H4R7CA01D-Murata-datasheet-12515295.pdf, ComponentLink3URL=https://datasheet.octopart.com/GRM1555C1H4R7CA01D-Murata-datasheet-12515295.pdf, ComponentLink4Description=https://datasheet.octopart.com/GRM1555C1H4R7CA01D-Murata-datasheet-12510076.pdf, ComponentLink4URL=https://datasheet.octopart.com/GRM1555C1H4R7CA01D-Murata-datasheet-12510076.pdf, ComponentLink5Description=https://datasheet.octopart.com/GRM1555C1H4R7CA01D-Murata-datasheet-11978611.pdf, ComponentLink5URL=https://datasheet.octopart.com/GRM1555C1H4R7CA01D-Murata-datasheet-11978611.pdf, ComponentLink6Description=https://datasheet.octopart.com/GRM1555C1H4R7CA01D-Murata-datasheet-10025737.pdf, ComponentLink6URL=https://datasheet.octopart.com/GRM1555C1H4R7CA01D-Murata-datasheet-10025737.pdf, ComponentLink7Description=https://datasheet.octopart.com/GRM1555C1H4R7CA01D-Murata-datasheet-8819587.pdf, ComponentLink7URL=https://datasheet.octopart.com/GRM1555C1H4R7CA01D-Murata-datasheet-8819587.pdf, ComponentLink8Description=https://datasheet.octopart.com:443/GRM1555C1H4R7CA01D-Murata-datasheet-141274223.pdf?src-supplier=Ciiva, ComponentLink8URL=https://datasheet.octopart.com:443/GRM1555C1H4R7CA01D-Murata-datasheet-141274223.pdf?src-supplier=Ciiva, ComponentLink9Description=https://datasheet.octopart.com:443/GRM1555C1H4R7CA01D-Murata-datasheet-140682516.pdf?src-supplier=Ciiva, ComponentLink9URL=https://datasheet.octopart.com:443/GRM1555C1H4R7CA01D-Murata-datasheet-140682516.pdf?src-supplier=Ciiva, ComponentLink10Description=https://datasheet.octopart.com:443/GRM1555C1H4R7CA01D-Murata-datasheet-138739644.pdf?src-supplier=Ciiva, ComponentLink10URL=https://datasheet.octopart.com:443/GRM1555C1H4R7CA01D-Murata-datasheet-138739644.pdf?src-supplier=Ciiva, ComponentLink11Description=https://datasheet.octopart.com:443/GRM1555C1H4R7CA01D-Murata-datasheet-81455562.pdf?src-supplier=TME, ComponentLink11URL=https://datasheet.octopart.com:443/GRM1555C1H4R7CA01D-Murata-datasheet-81455562.pdf?src-supplier=TME, ComponentLink12Description=https://datasheet.octopart.com:443/GRM1555C1H4R7CA01D-Murata-datasheet-22122223.pdf?src-supplier=Future+Electronics, ComponentLink12URL=https://datasheet.octopart.com:443/GRM1555C1H4R7CA01D-Murata-datasheet-22122223.pdf?src-supplier=Future+Electronics, ComponentLink13Description=https://datasheet.octopart.com:443/GRM1555C1H4R7CA01D-Murata-datasheet-11631916.pdf?src-supplier=Arrow+Electronics, ComponentLink13URL=https://datasheet.octopart.com:443/GRM1555C1H4R7CA01D-Murata-datasheet-11631916.pdf?src-supplier=Arrow+Electronics, ComponentLink14Description=http://sigma.octopart.com:80/reach_statement/Murata-company-16.pdf?src-supplier=Compliance+Statements, ComponentLink14URL=http://sigma.octopart.com:80/reach_statement/Murata-company-16.pdf?src-supplier=Compliance+Statements, Depth=500µm, Dielectric Material=Ceramic, Export Control Classification Number (ECCN) Code=EAR99, Harmonized Tariff Schedule (HTS) Code=8532.24.00.20, Height=500µm, Introduction Date=2008-09-01, Lead Free="Lead Free", Length=1mm, Lifecycle Status=NRND, Material=Ceramic, Mounting Technology="Surface Mount", Number of Terminals=2, Package Size=0402, Packaging="Cut Tape", Pricing="1=0.1, 10=0.022, 50=0.0146, 100=0.0123, 500=0.00858, 1000=0.00744, 2500=0.00625, 5000=0.00554 (USD)", Radiation Hardening=No, REACH SVHC=Yes, RoHS=Compliant, Schedule B="8532240020, 8532240020|8532240020, 8532240020|8532240020|8532240020, 8532240020|8532240020|8532240020|8532240020", Stock=1474189, Supplier=DigiKey, Termination=SMD/SMT, Thickness=500µm, Voltage Rating (DC)=50V, Width=500µm